# Altium PCB PCB2.PcbDoc
Units mm, origin at the board's own origin, x right, y up, seen from the top; angles counter-clockwise.
Board outline 89.99 x 120 mm, 2 copper layers (Top Layer, Bottom Layer), stack 1.57 mm thick; 16 components, 15 nets, 182 pads, 0 vias.
Unrouted connection lines stored in the file: 9.
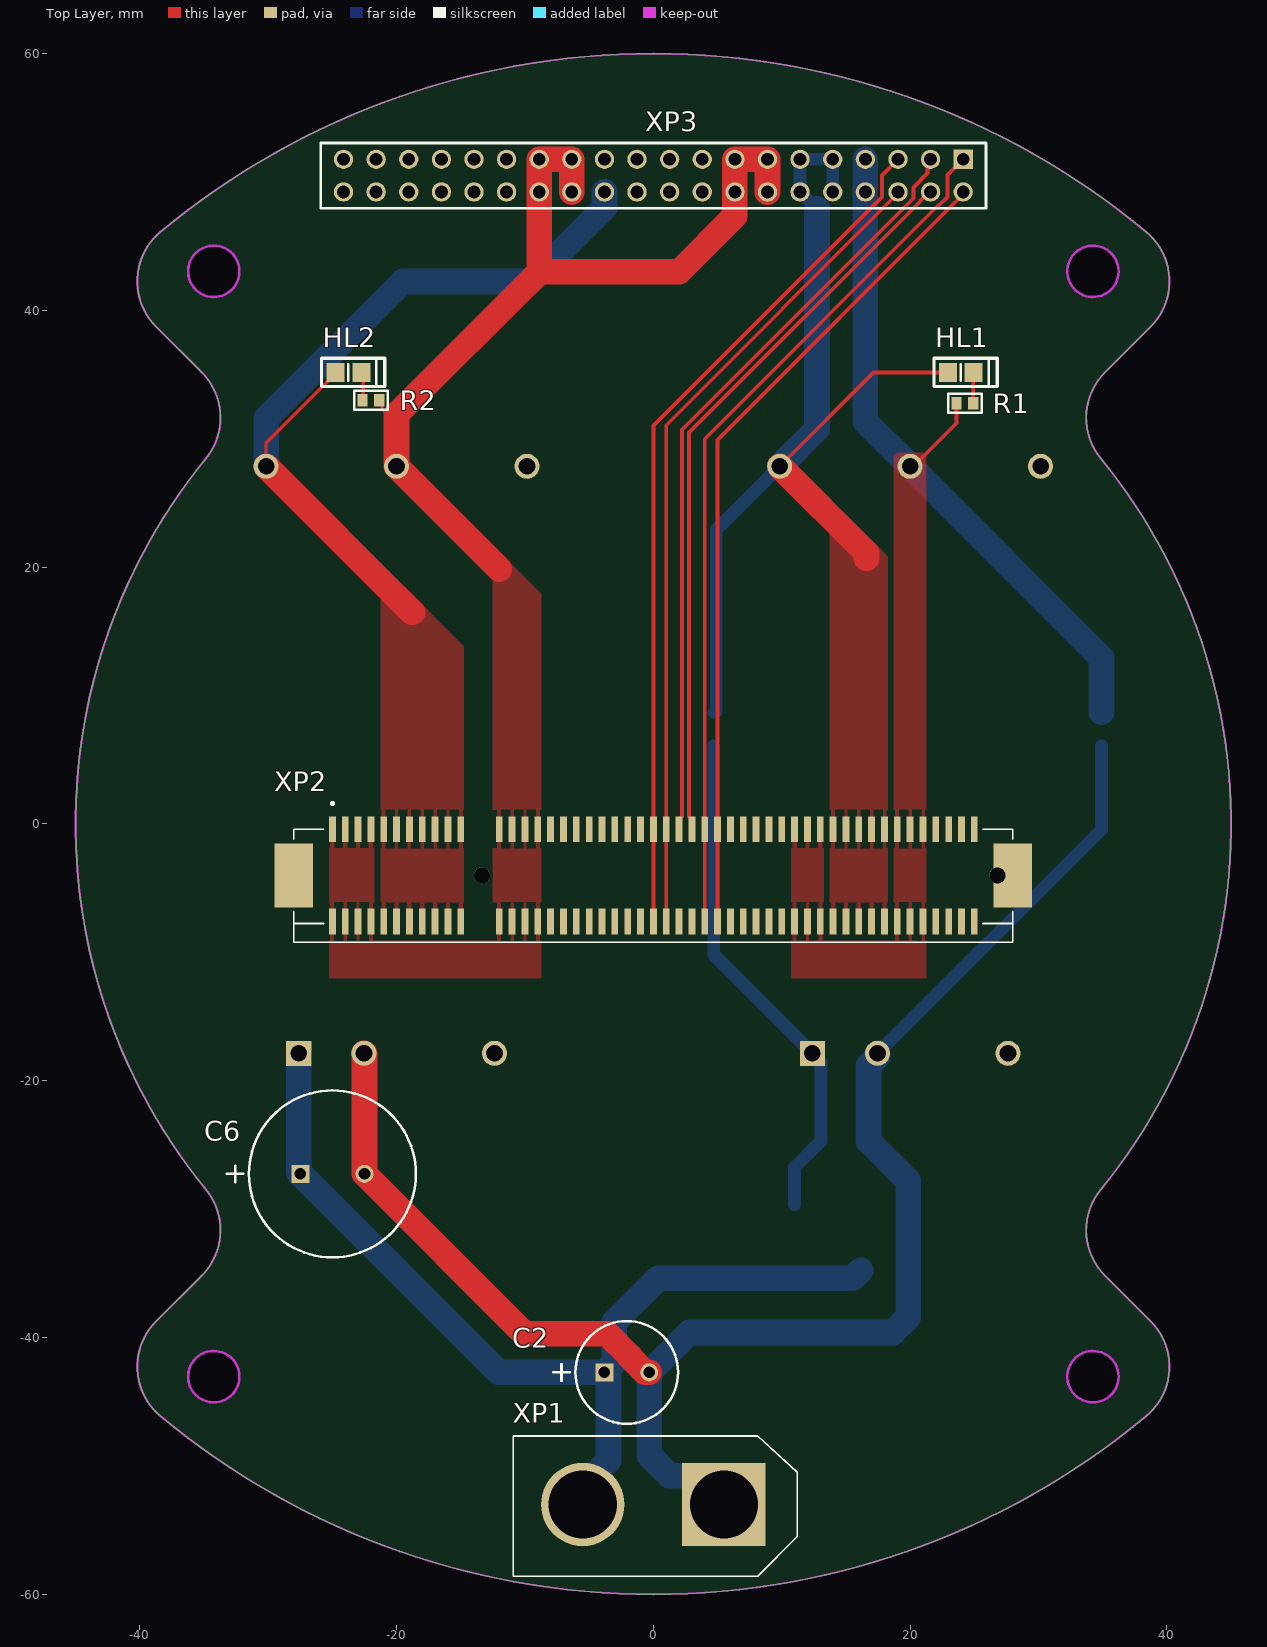
[diagram p0: Top Layer view]
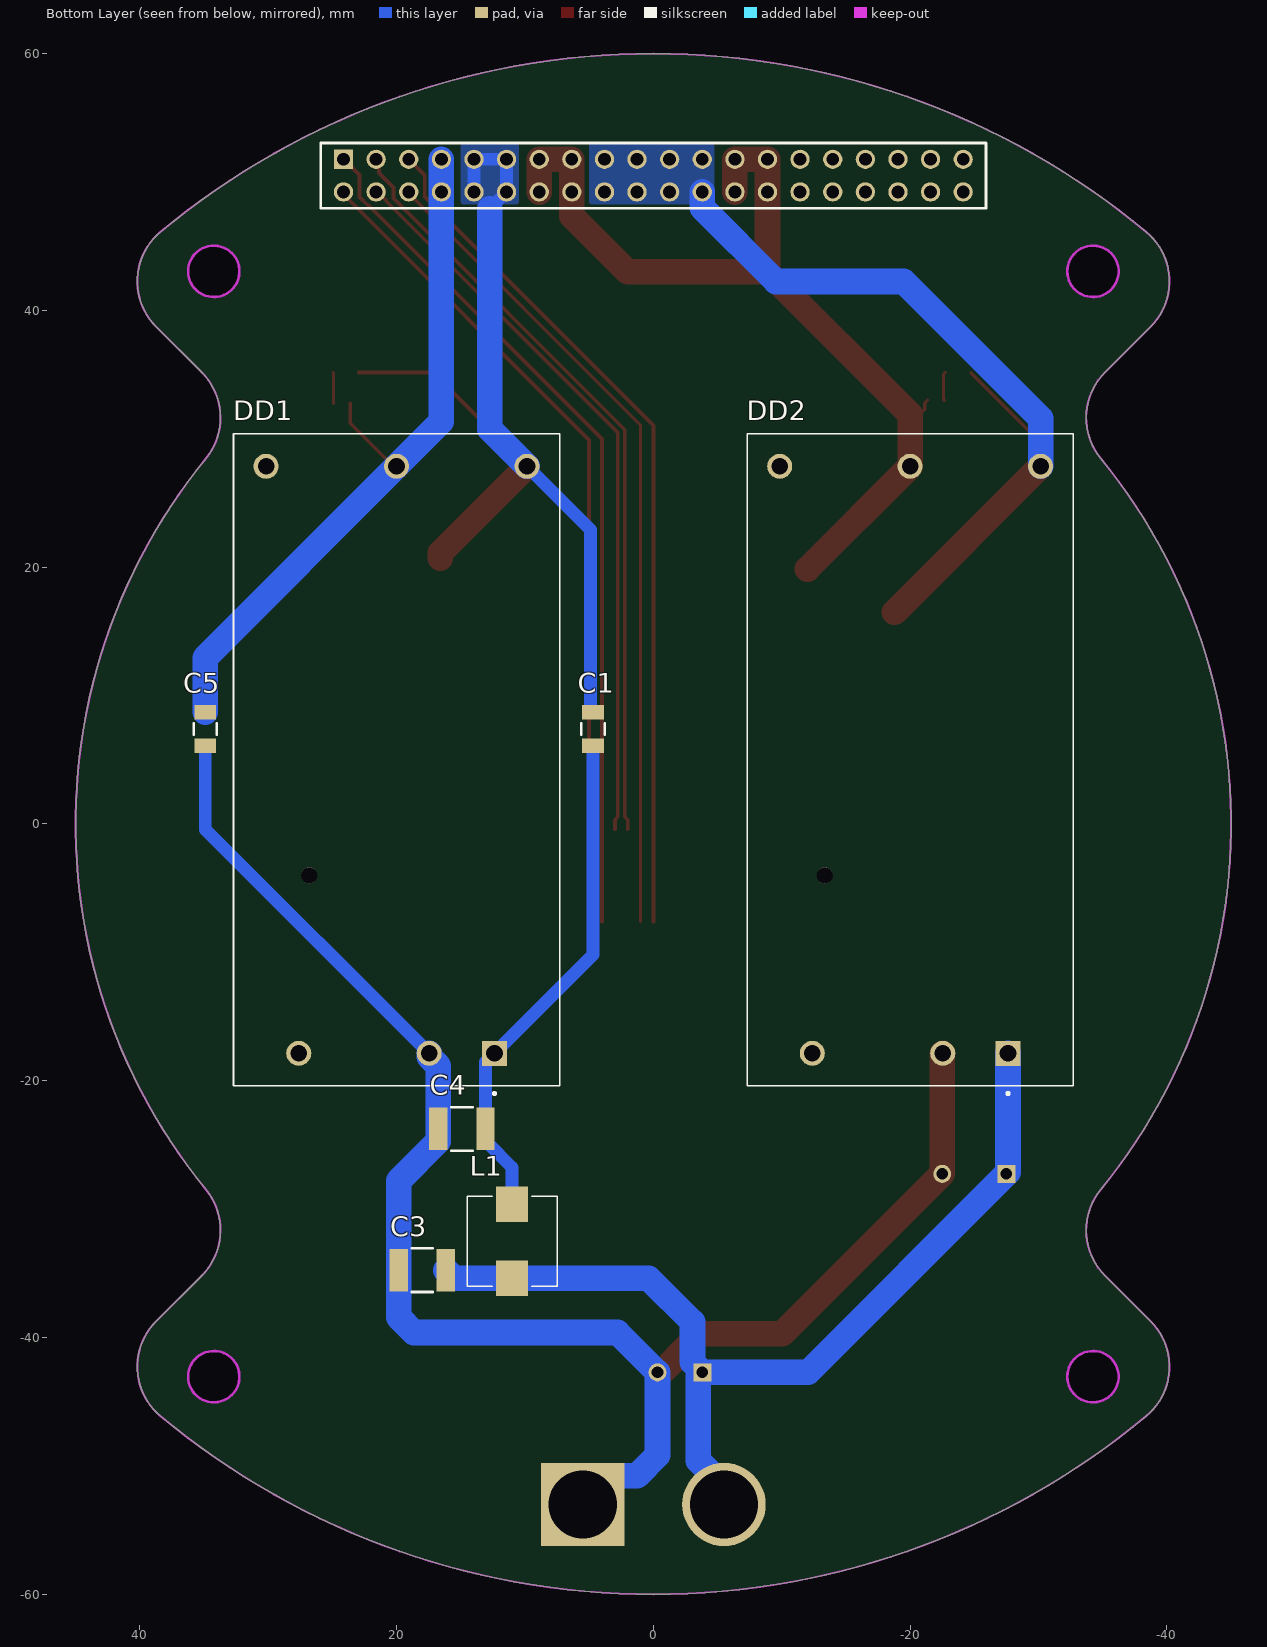
[diagram p1: Bottom Layer view, seen from below]
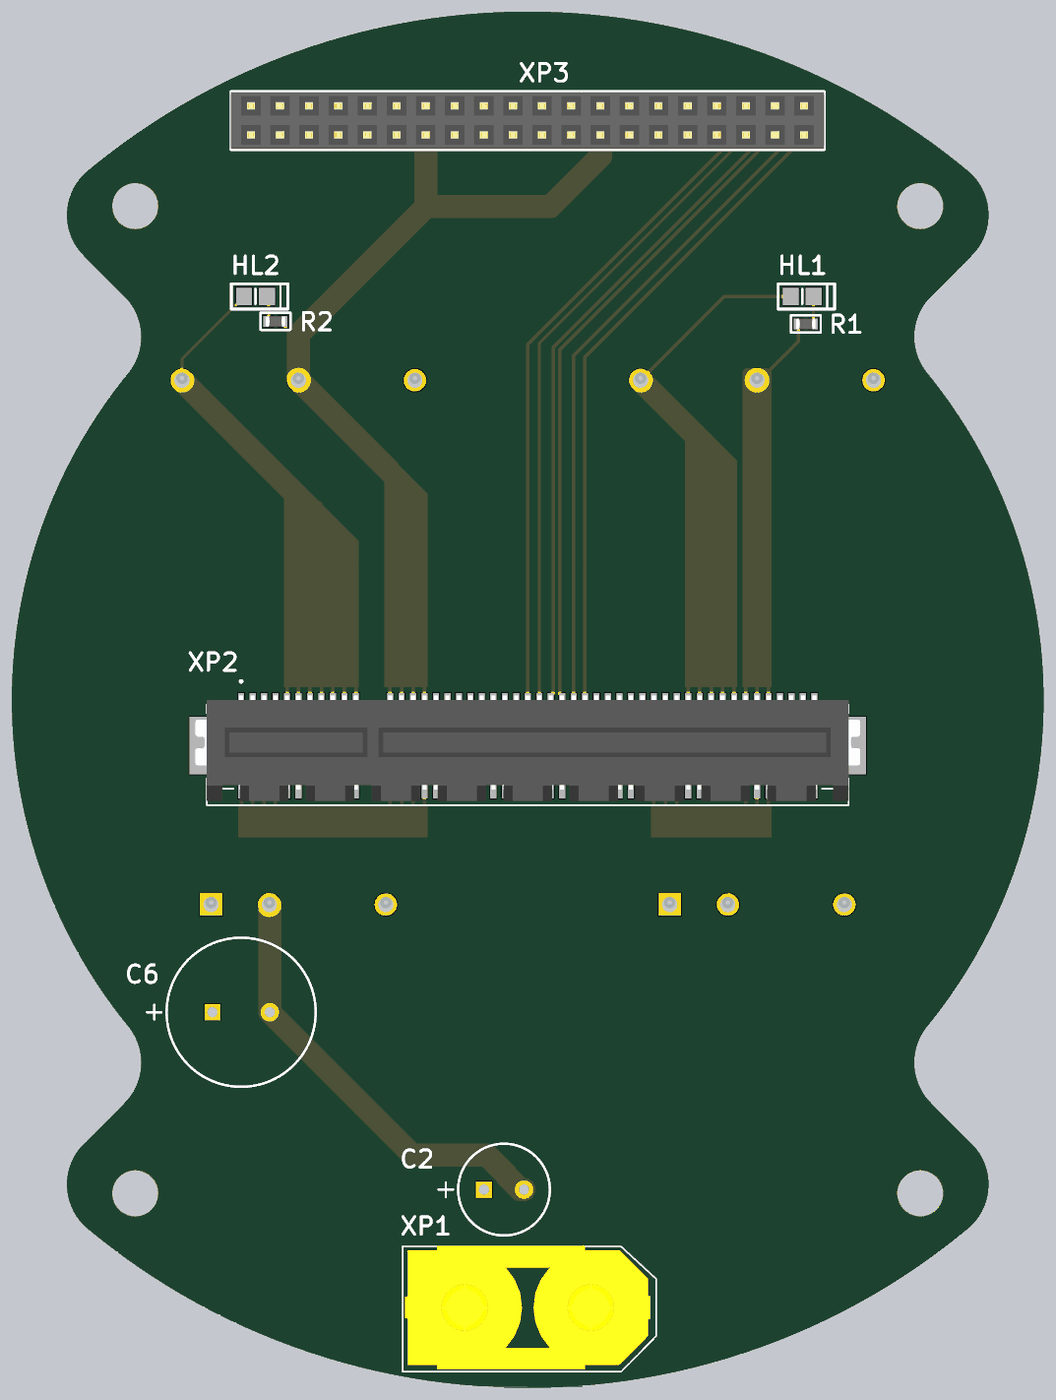
[diagram p2: 3D render of the assembled board from above, using the file's embedded part models]
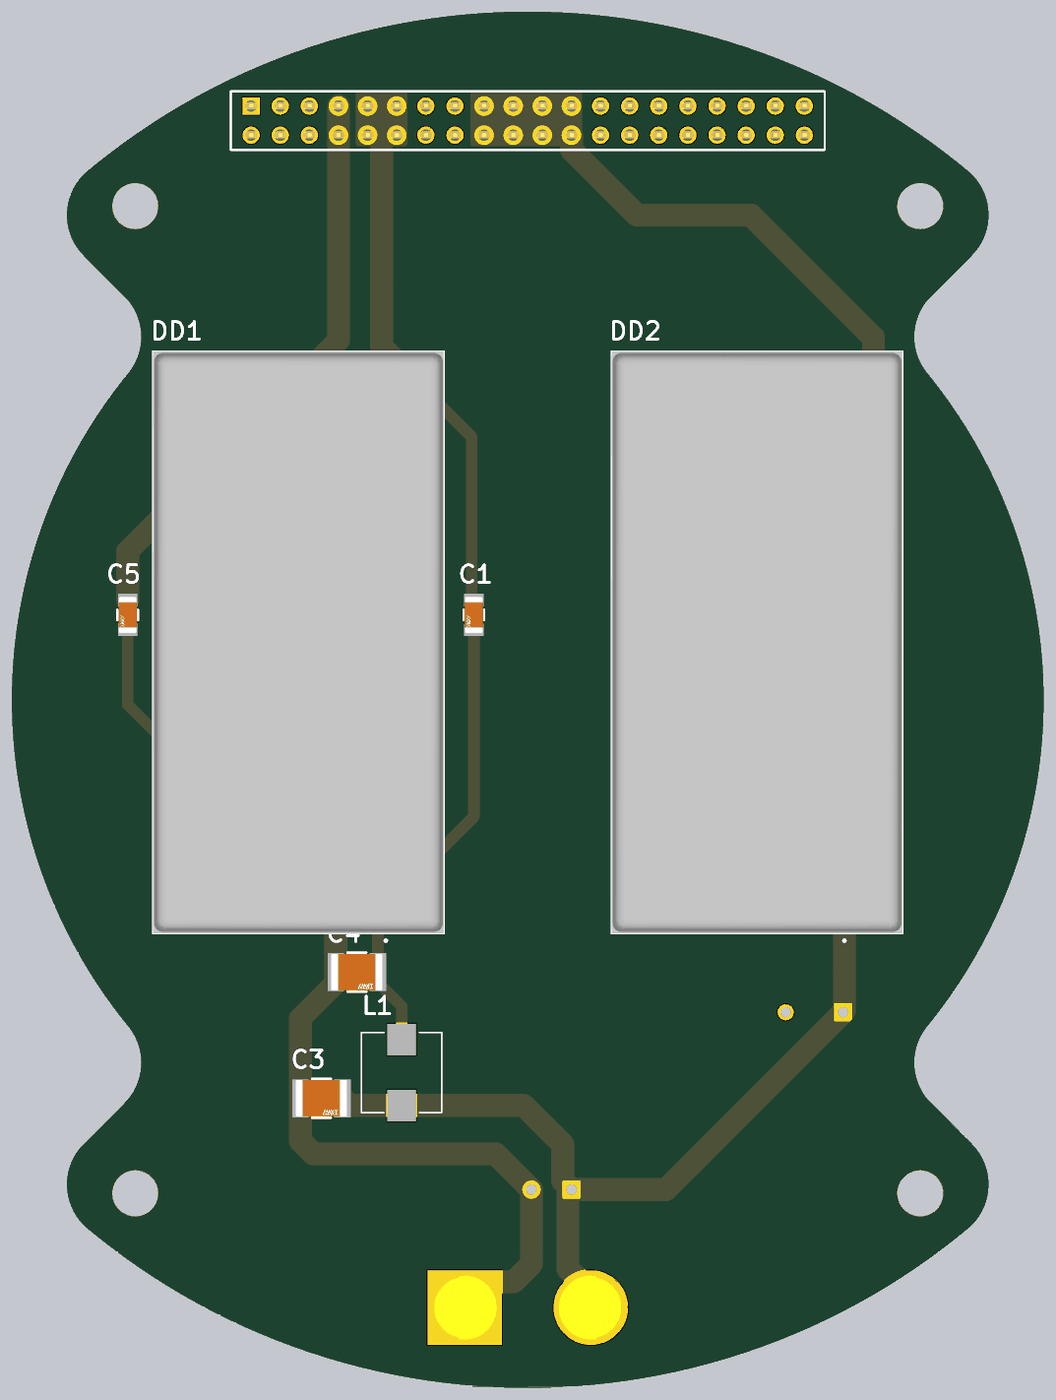
[diagram p3: 3D render of the assembled board from below, using the file's embedded part models]

## Layer stack, top to bottom
Top Solder: solder mask 0.0102, Solder Resist, Dk 3.5
Top Layer: signal copper 0.035
Dielectric 1: dielectric 1.5, FR-4, Dk 4.8
Bottom Layer: signal copper 0.035
Bottom Solder: solder mask 0.0102, Solder Resist, Dk 3.5

## Board outline
-38.394,-46.108 cw(c-35.194,-42.265) -38.73,-38.73 -35.178,-35.178 ccw(c-38.714,-31.643) -34.842,-28.478 cw(c0,0) -34.842,28.478 ccw(c-38.714,31.643) -35.178,35.178 -38.73,38.73 cw(c-35.194,42.265) -38.394,46.108 cw(c0,0) 38.394,46.108 cw(c35.194,42.265) 38.73,38.73 35.178,35.178 ccw(c38.714,31.643) 34.842,28.478 cw(c0,0) 34.842,-28.478 ccw(c38.714,-31.643) 35.178,-35.178 38.73,-38.73 cw(c35.194,-42.265) 38.394,-46.108 cw(c0,0)

## Design rules (kind name [scope] priority, off if disabled: settings)
Clearance [All] p1: gap=0.25 ignorepadtopadclearanceinfootprint=FALSE
DiffPairsRouting [All] p1: maxlimit=0.3 minlimit=0.2 mostfreqgap=0.25 toplayer_minwidth=0.2 toplayer_maxwidth=1 toplayer_prefwidth=0.25 bottomlayer_minwidth=0.2 bottomlayer_maxwidth=1 bottomlayer_prefwidth=0.25 maxuncoupledlength=12.7
Height [All] p1: minheight=0 maxheight=30 prefheight=12.7
HoleSize [All] p1: absolutevalues=TRUE maxlimit=7 minlimit=0.2 maxpercent=80.000 minpercent=20.000
MinimumSolderMaskSliver [All] p1: minsoldermaskwidth=0.2
PlaneClearance [All] p1: clearance=1
PlaneConnect [All] p1: planeconnectstyle=Direct reliefexpansion=0.508 reliefentries=4 reliefconductorwidth=0.254 reliefairgap=0.254
PolygonConnect PolygonConnectVIA [IsVia] p1: connectstyle=Direct reliefconductorwidth=0.254 reliefentries=4 polygonreliefangle="90 Angle" airgapwidth=0.254
PolygonConnect PolygonConnectPAD [All] p2: thpad.connectstyle=Direct thpad.reliefconductorwidth=0.3 thpad.reliefentries=4 thpad.polygonreliefangle="90 Angle" thpad.airgapwidth=0.5 smdpad.connectstyle=Relief smdpad.reliefconductorwidth=0.3 smdpad.reliefentries=4 smdpad.polygonreliefangle="90 Angle" smdpad.airgapwidth=0.5 via.connectstyle=Relief via.reliefconductorwidth=0.3 via.reliefentries=4 via.polygonreliefangle="90 Angle" via.airgapwidth=0.5
RoutingVias [All] p1: holewidth=0.3 width=0.7 viastyle="Through Hole" minholewidth=0.3 minwidth=0.5 maxholewidth=3 maxwidth=4
SolderMaskExpansion [All] p1: expansion=0.1 istentingtop=FALSE
Width power [InNet('No Net')] p1: maxlimit=3 minlimit=0.5 preferedwidth=0.5
Width signal [All] p2: maxlimit=3 minlimit=0.2 preferedwidth=0.25 minimp=50.000000 maximp=50.000000 favimp=50.000000
Width power_signal [InNet('No Net')] p3: maxlimit=3 minlimit=0.3 preferedwidth=0.6
24 further rules are at their usual default settings.

## Classes and differential pairs
component class dcdc: C1 C2 C3 C4 C5 C6 DD1 DD2 HL1 HL2 L1 R1 R2 XP1
component class connectors: D3 D4 D5 D6 D7 D8 L2 XP2 XP3 XP?
differential pair RS485: +RS485_P -RS485_N

## Components (designator, comment, footprint, x,y, rotation, side; value= is the part's Value field where it differs from the comment)
C1 "Capacitor" 1206 4.7,7.4 r270 bottom value="1нФ  2кВ"
C2 "100uF" CAPPR65-350-1150X800X1250 -2.074,-42.713 r0 top value=100мкФ
C3 "Capacitor" 1812 18,-34.75 r180 bottom value="6,8мкФ 50В"
C4 "Capacitor" 1812 14.909,-23.75 r180 bottom value="6,8мкФ 50В"
C5 "Capacitor" 1206 34.9,7.4 r270 bottom value="1нФ  2кВ"
C6 "1uF" THD12.5.25 -25,-27.25 r0 top value="1.2мФ 50В"
DD1 "TEN_60-2411WIN" CONV_TEN_60-2411WIN 20,5 r90 bottom value=DC/DC
DD2 "TEN_50-2412WIN" CONV_TEN_60-2411WIN -20,5 r90 bottom value=DC/DC
HL1 "=Value" 0805D 23.85,35.269 r0 top
HL2 "=Value" 0805D -23.85,35.269 r0 top
L1 "Inductance" TCK-102 11,-32.5 r90 bottom value="3,3мкГ 10А"
R1 "Resistor" 0603R 24.26,32.769 r0 top value="1,3 к"
R2 "Resistor" 0603R -22,33 r180 top value="1,3 к"
XP1 "XT-90" AMASS_XT90-M 0,-53 r180 top value=XT90-S
XP2 "PCI Express x8" pci-e-x8 0,-4 r0 top
XP3 "PC104-20*2" "PC - 104 20X2" 0,50.5 r180 top locked

## Footprints (in the part's own frame and the unit in brackets; to place one, negate y for a bottom-side part, rotate by r counter-clockwise, add the part's x,y. Pads: shape width x height; smd on the part's side, far side on the other; paste and mask are expansions set on the pad)
0603R [mm] "Chip Resistor, 2-Leads, Body 1.60x0.85mm, IPC Medium Density"
  rect 0.8x0.95 smd: 1(-0.65,0) 2(0.65,0)
  silkscreen extent -1.3,-0.75 1.3,0.75, body extent -0.87,-0.47 0.88,0.48, height 0.9
0805D [mm]
  rect 1.4x1.5 smd: 1(-0.9,-0.1) 2(1.1,-0.1)
  silkscreen extent -2,-1.2 2.93,1, body extent -0.97,-0.8 1.17,0.6, height 0.7
1206 [mm]
  rect 1.105x1.706 smd paste+0 mask+0: 1(-1.301,0) 2(1.301,0)
  silkscreen extent -0.45,-0.9 0.45,0.9, body extent -1.6,-0.8 1.6,0.8, height 1.27
1812 [mm]
  rect 1.423x3.306 smd paste+0 mask+0: 1(-1.841,0) 2(1.841,0)
  silkscreen extent -0.83,-1.7 0.83,1.7, body extent -2.25,-1.6 2.25,1.6, height 1.27
AMASS_XT90-M [mm]
  rect 6.5x6.5 hole 5.3: 1(-5.5,0)
  round 6.5 hole 5.3: 2(5.5,0)
  silkscreen extent -11.2,-5.33 10.92,5.59, body extent -10.7,-5.4 10.7,5.4, height 21.9
CAPPR65-350-1150X800X1250 [mm] "THD, 2-Leads, Dia 8mm, Body 11.5mm"
  rect 1.4x1.4 hole 0.9: 1(-1.75,0)
  round 1.4 hole 0.9: 2(1.75,0)
  silkscreen extent -5.71,-4 4,4, body extent -4,-4 4,4, height 12.5
CONV_TEN_60-2411WIN [mm]
  rect 1.95x1.95 hole 1.3: 1(-22.86,-7.62)
  round 1.95 hole 1.3: 2(-22.86,-2.54) 3(-22.86,7.62) 4(22.86,-10.16) 5(22.86,0) 6(22.86,10.16)
  silkscreen extent -26.1,-12.7 25.4,12.7, body extent -25.4,-12.7 25.4,12.7, height 10.2
"PC - 104 20X2" [mm] "Connector; Header; 20x2 Position"
  rect 1.5x1.5 hole 1: 1(-24.13,-1.27)
  round 1.5 hole 1: 2(-24.13,1.27) 3(-21.59,-1.27) 4(-21.59,1.27) 5(-19.05,-1.27) 6(-19.05,1.27) 7(-16.51,-1.27) 8(-16.51,1.27) 9(-13.97,-1.27) 10(-13.97,1.27) 11(-11.43,-1.27) 12(-11.43,1.27) 13(-8.89,-1.27) 14(-8.89,1.27) 15(-6.35,-1.27) 16(-6.35,1.27) 17(-3.81,-1.27) 18(-3.81,1.27) 19(-1.27,-1.27) 20(-1.27,1.27) 21(1.27,-1.27) 22(1.27,1.27) 23(3.81,-1.27) 24(3.81,1.27) 25(6.35,-1.27) 26(6.35,1.27) 27(8.89,-1.27) 28(8.89,1.27) 29(11.43,-1.27) 30(11.43,1.27) 31(13.97,-1.27) 32(13.97,1.27) 33(16.51,-1.27) 34(16.51,1.27) 35(19.05,-1.27) 36(19.05,1.27) 37(21.59,-1.27) 38(21.59,1.27) 39(24.13,-1.27) 40(24.13,1.27)
  silkscreen extent -25.91,-2.54 25.91,2.54, body extent -25.88,-2.47 25.92,2.43, height 12.5
pci-e-x8 [mm]
  rect 0.53x2 smd: A1(-25,3.6) A2(-24,3.6) A3(-23,3.6) A4(-22,3.6) A5(-21,3.6) A6(-20,3.6) A7(-19,3.6) A8(-18,3.6) A9(-17,3.6) A10(-16,3.6) A11(-15,3.6) A12(-12,3.6) A13(-11,3.6) A14(-10,3.6) A15(-9,3.6) A16(-8,3.6) A17(-7,3.6) A18(-6,3.6) A19(-5,3.6) A20(-4,3.6) A21(-3,3.6) A22(-2,3.6) A23(-1,3.6) A24(0,3.6) A25(1,3.6) A26(2,3.6) A27(3,3.6) A28(4,3.6) A29(5,3.6) A30(6,3.6) A31(7,3.6) A32(8,3.6) A33(9,3.6) A34(10,3.6) A35(11,3.6) A36(12,3.6) A37(13,3.6) A38(14,3.6) A39(15,3.6) A40(16,3.6) A41(17,3.6) A42(18,3.6) A43(19,3.6) A44(20,3.6) A45(21,3.6) A46(22,3.6) A47(23,3.6) A48(24,3.6) A49(25,3.6) B1(-25,-3.6) B2(-24,-3.6) B3(-23,-3.6) B4(-22,-3.6) B5(-21,-3.6) B6(-20,-3.6) B7(-19,-3.6) B8(-18,-3.6) B9(-17,-3.6) B10(-16,-3.6) B11(-15,-3.6) B12(-12,-3.6) B13(-11,-3.6) B14(-10,-3.6) B15(-9,-3.6) B16(-8,-3.6) B17(-7,-3.6) B18(-6,-3.6) B19(-5,-3.6) B20(-4,-3.6) B21(-3,-3.6) B22(-2,-3.6) B23(-1,-3.6) B24(0,-3.6) B25(1,-3.6) B26(2,-3.6) B27(3,-3.6) B28(4,-3.6) B29(5,-3.6) B30(6,-3.6) B31(7,-3.6) B32(8,-3.6) B33(9,-3.6) B34(10,-3.6) B35(11,-3.6) B36(12,-3.6) B37(13,-3.6) B38(14,-3.6) B39(15,-3.6) B40(16,-3.6) B41(17,-3.6) B42(18,-3.6) B43(19,-3.6) B44(20,-3.6) B45(21,-3.6) B46(22,-3.6) B47(23,-3.6) B48(24,-3.6) B49(25,-3.6)
  rect 3x5 smd: SH1(-28,0) SH2(28,0)
  round 1.25 hole 1.25 unplated: ""(-13.35,0) ""(26.8,0)
  silkscreen extent -28,-5.2 28,5.7, body extent -29,-4.83 29,4.37, height 11.25
TCK-102 [mm]
  rect 2.75x2.5 smd: 1(-2.875,0) 2(2.875,0)
  silkscreen extent -3.5,-3.5 3.5,3.5, body extent -3.25,-3.25 3.25,3.25, height 4.2
THD12.5.25 [mm] "THD, 2-Leads, Dia 12.5mm, Body 25mm"
  rect 1.4x1.4 hole 0.9: 1(-2.5,0)
  round 1.4 hole 0.9: 2(2.5,0)
  silkscreen extent -8.22,-6.5 6.5,6.5, body extent -6.23,-6.28 6.27,6.22, height 26

## Part data
C2: library part Capacitor_pol_100uF, Shop=https://www.chipdip.ru/product0/9000565887
C6: library part Capacitor_pol, Shop="https://www.chipdip.ru/product0/8003159251 https://www.promelec.ru/product/379547/"
DD1: Package=None, Availability=Unavailable, MP=TEN_60-2411WIN, Price=None
DD2: library part TEN_60-2411WIN, Package=None, Availability=Unavailable, MP=TEN_60-2411WIN, Price=None
HL1 HL2: library part LED, Case=-, Color={Цвет}, Datasheet=-, Manufacturer=-, Notice=-, Rate=-, Shop=-
XP1: Case=корпус, Manufacturer=Connfly, Value1=GND, Value2=+VBAT, Datasheet=https://lib.chipdip.ru/413/DOC001413777.pdf, Notice="Вилка-мама 2 пина, шаг 2.5мм", Rate="500В AC 1min", Shop=https://www.chipdip.ru/product/cwf-2
XP2: library part "PCI E x8", "PCI ExpressÂ®x8 vertical Card Edge Connector, 98 Positions, 1mm (0.039inch) Pitch", Package=None, Availability="In Stock", Check_prices=https://www.snapeda.com/parts/10146070-112Y0LF/Amphenol+FCI/view-part/?ref=eda, MF="Amphenol ICC (FCI)", MP=10146070-112Y0LF, Price=None, Purchase-URL=https://pricing.snapeda.com/search/part/10146070-112Y0LF/?ref=eda, SnapEDA_Link=https://www.snapeda.com/parts/10146070-112Y0LF/Amphenol+FCI/view-part/?ref=snap
XP3: Value1=CAN_H, Value2=CAN_L, Value3=RS485_A, Value4=RS485_B, Value5="I2C SCL", Value6="I2C SDA", Value7={Value7}, Value8={Value8}, Value9={Value9}, Value10={Value10}, Value11={Value11}, Value12={Value12}, Value13=Общ., Value17=+12В, Value29={Value29}, Value30={Value30}, Value31={Value31}, Value32={Value32}, Value33={Value33}, Value34={Value34}, Value35={Value35}, Value36={Value36}, Value37={Value37}, Value38={Value38}, Value39={Value39}, Value40={Value40}, Notice=PC104-40, Value14=Общ., Value15=Общ., Value16=Общ., Value18=+12В, Value19=+12В, Value20=+12В, Value21=+12В, Value22=+12В, Value23=+12В, Value24=+12В, Value25=Общ., Value26=Общ., Value27=Общ., Value28=Общ.
L1: Shop=https://www.chipdip.ru/product1/8009327451

## Free pads (board coordinates)
  round 2 hole 4: п1(-34.238,-43.043) п1(-34.238,43.043) п1(34.238,-43.043) п1(34.238,43.043)

## Nets (pads, with @x,y where several pads share a name; then routed paths per layer and width w, separated by ;. In a path a pad name is that pad's centre, name@x,y a point inside that pad or via, vN(x,y) a via of type N, cw(c..) or ccw(c..) an arc to the next point about the centre after c; other vN are vias at no path point)
+5В: C1.1 DD1.4 HL1.1 XP2.A38 XP2.A39 XP2.A40 XP2.A41 XP2.A42 XP2.B38 XP2.B39 XP2.B40 XP2.B41 XP2.B42 XP3.9 XP3.10 XP3.11 XP3.12 | length 78.2
  Top Layer w0.3: DD1.4 17.149,35.169 HL1.1
  Top Layer w2: DD1.4 16.6,21.1 16.6,20.7
  Bottom Layer w1: C1.1 4.848,8.701 4.9,8.753 4.9,22.92 DD1.4 ; 12.75,47.91 XP3.12 XP3.11 XP3.9 XP3.10
  Bottom Layer w2: DD1.4 12.75,30.77 12.75,47.91
+12В: DD2.4 HL2.1 XP2.A5 XP2.A6 XP2.A7 XP2.A8 XP2.A9 XP2.A10 XP2.A11 XP2.B5 XP2.B6 XP2.B7 XP2.B8 XP2.B9 XP2.B10 XP2.B11 XP3.17 XP3.18 XP3.19 XP3.20 XP3.21 XP3.22 XP3.23 XP3.24 | length 63.8
  Top Layer w0.25: DD2.4 -30.16,29.709 -24.75,35.119 HL2.1
  Top Layer w2: DD2.4 -18.8,16.5 -18.75,16.5
  Bottom Layer w2: DD2.4 -30.16,31.59 -19.5,42.25 -9.55,42.25 -3.81,47.99 XP3.24
CAN_H: XP2.A28 XP2.B28 XP3.1 | length 67.7
  Top Layer w0.3: XP2.B28 XP2.A28 4,30 22.192,48.192 22.249,48.192 22.9,48.843 22.9,50.54 XP3.1
CAN_L: XP2.A29 XP2.B29 XP3.2 | length 64.8
  Top Layer w0.3: XP2.B29 XP2.A29 5,29.916 24.13,49.046 XP3.2
GND_5: C5.1 DD1.5 R1.1 XP2.A35 XP2.A36 XP2.A37 XP2.A43 XP2.A44 XP2.A45 XP2.B35 XP2.B36 XP2.B37 XP2.B43 XP2.B44 XP2.B45 XP3.7 XP3.8 | length 57.2
  Top Layer w0.3: DD1.5 20.26,27.86 23.61,31.21 R1.1
  Bottom Layer w2: XP3.7 XP3.8 16.51,31.35 DD1.5 34.9,12.96 C5.1
GND_12: DD2.5 R2.1 XP2.A1 XP2.A2 XP2.A3 XP2.A4 XP2.A12 XP2.A13 XP2.A14 XP2.A15 XP2.B1 XP2.B2 XP2.B3 XP2.B4 XP2.B12 XP2.B13 XP2.B14 XP2.B15 XP3.13 XP3.14 XP3.15 XP3.16 XP3.25 XP3.26 XP3.27 XP3.28 | length 76.9
  Top Layer w0.25: R2.1 -21.135,32.785 -21.135,32.31 -20.7,31.875 -20.7,28.856 DD2.5@-20,28.156
  Top Layer w2: -12,19.86 DD2.5 -20,28.156 -20,31.89 -8.89,43 ; XP3.26 XP3.25 XP3.27 XP3.28 -8.89,43 ; XP3.14 XP3.13 XP3.15 XP3.16 6.35,47.35 2,43 -8.89,43
GND_BAT: C2.2 C3.1 C4.1 C5.2 C6.2 DD1.2 DD2.2 XP1.1 | length 126.9
  Top Layer w2: DD2.2 -22.5,-17.9 C6.2 -10.05,-39.7 -3.598,-39.7 -1.824,-41.474 -1.824,-41.541 -0.652,-42.713 C2.2
  Bottom Layer w1: DD1.2 34.9,-0.42 C5.2
  Bottom Layer w2: XP1.1@5.2,-53 2.95,-50.75 1.25,-50.75 -0.324,-49.176 C2.2 2.789,-39.6 18.669,-39.6 19.841,-38.428 19.841,-27.782 16.75,-24.692 C4.1 16.75,-18.827 17.46,-18.117 DD1.2
I2C_SCL: XP2.A24 XP2.B24 XP3.5 | length 67.3
  Top Layer w0.3: XP2.B24 XP2.A24 0,31.023 17.8,48.823 17.8,50.52 XP3.5
I2C_SDA: XP2.A25 XP2.B25 XP3.6 | length 64.3
  Top Layer w0.25: XP2.B25 XP2.A25 1,31.067 19.05,49.117 XP3.6
NetC1_2: C1.2 C4.2 DD1.1 L1.2 | length 40.1
  Bottom Layer w1: C1.2 4.7,-10.18 DD1.1 13.069,-18.549 C4.2 13.069,-24.692 12.857,-24.903 12.847,-24.903 11,-26.75 L1.2
NetHL1_2: HL1.2 R1.2 | length 2.4
  Top Layer w0.25: R1.2 24.91,35.129 HL1.2
NetHL2_2: HL2.2 R2.2 | length 2.3
  Top Layer w0.25: HL2.2 -22.6,35.019 -22.6,33.05 R2.2
RS485_N: XP2.A27 XP2.B27 XP3.4 | length 57.6
  Top Layer w0.3: XP2.A27 3,0.335 2.775,0.56 2.775,30.48 20.8,48.505 20.8,48.571 21.459,49.23 XP3.4
RS485_P: XP2.A26 XP2.B26 XP3.3 | length 60.3
  Top Layer w0.3: XP2.A26 2,0.335 2.225,0.56 2.225,30.708 20.25,48.733 20.25,49.587 21.36,50.697 21.36,51.54 XP3.3
VBAT: C2.1 C3.2 C6.1 DD2.1 L1.1 XP1.2 | length 76
  Bottom Layer w2: DD2.1 -27.62,-27.13 C6.1 -12.037,-42.713 C2.1 ; XP1.2@-5.8,-53 -5.8,-51.878 -3.5,-49.578 -3.5,-43.036 C2.1 ; C3.2 15.534,-35.375 L1.1 0.375,-35.375 -3.044,-38.794 -3.044,-41.933 C2.1
pads on no net: DD1.3 DD1.6 DD2.3 DD2.6 XP2. XP2.A16 XP2.A17 XP2.A18 XP2.A19 XP2.A20 XP2.A21 XP2.A22 XP2.A23 XP2.A30 XP2.A31 XP2.A32 XP2.A33 XP2.A34 XP2.A46 XP2.A47 XP2.A48 XP2.A49 XP2.B16 XP2.B17 XP2.B18 XP2.B19 XP2.B20 XP2.B21 XP2.B22 XP2.B23 XP2.B30 XP2.B31 XP2.B32 XP2.B33 XP2.B34 XP2.B46 XP2.B47 XP2.B48 XP2.B49 XP2.SH1 XP2.SH2 XP3.29 XP3.30 XP3.31 XP3.32 XP3.33 XP3.34 XP3.35 XP3.36 XP3.37 XP3.38 XP3.39 XP3.40

## Polygon pours and split planes (outlines as drawn)
+12В on Bottom Layer "+12В_L02_P001" (solid, pour order 1): 5,48.5 5,52.75 ccw(c4.75,52.75) 4.75,53 -4.49,53 ccw(c-4.49,52.75) -4.74,52.75 -4.74,48.5 ccw(c-4.49,48.5) -4.49,48.25 4.75,48.25 ccw(c4.75,48.5)
+5В on Bottom Layer "+5В_L02_P000" (solid, pour order 0): 15,48.5 15,52.75 ccw(c14.75,52.75) 14.75,53 10.75,53 ccw(c10.75,52.75) 10.5,52.75 10.5,48.5 ccw(c10.75,48.5) 10.75,48.25 14.75,48.25 ccw(c14.75,48.5)
GND_5 on Top Layer "GND_5_L01_P010" (solid, pour order 10): 10.75,-9.1 20.55,-9.1 20.55,-12 10.75,-12
GND_5 on Top Layer "GND_5_L01_P003" (solid, pour order 3): 18.735,28.635 18.735,-12 21.265,-12 21.265,28.635 21,28.9 19,28.9
GND_5 on Top Layer "GND_5_L01_P004" (solid, pour order 4): 10.75,0.6 10.75,-12 13.28,-12 13.28,0.6
GND_12 on Top Layer "GND_12_L01_P009" (solid, pour order 9): -22.1,-9.1 -12.3,-9.1 -12.3,-12 -22.1,-12
GND_12 on Top Layer "GND_12_L01_P008" (solid, pour order 8): -12.5,20.4 -12.5,-12 -8.75,-12 -8.75,17.95 -11.2,20.4
+12В on Top Layer "+12В_L01_P007" (solid, pour order 7): -21.25,18.5 -21.25,-8.6 -14.75,-8.6 -14.75,13.85 -19.4,18.5
GND_12 on Top Layer "GND_12_L01_P006" (solid, pour order 6): -25.25,0.6 -25.25,-12 -21.75,-12 -21.75,0.6
+5В on Top Layer "+5В_L01_P005" (solid, pour order 5): 13.735,24.4 13.735,-8.6 18.25,-8.6 18.25,20.85 14.7,24.4

## Keep-outs
Keep-Out Layer:
  circle w0.2: c-34.238,43.043 r2
  circle w0.2: c34.238,-43.043 r2
  circle w0.2: c-34.238,-43.043 r2
  circle w0.2: c34.238,43.043 r2
  lines w0.15: -38.73,-38.73 ccw(c-35.194,-42.265) -38.394,-46.108 ccw(c0,0) 38.394,-46.108 ccw(c35.194,-42.265) 38.73,-38.73 35.178,-35.178 cw(c38.714,-31.643) 34.842,-28.478 ccw(c0,0) 34.842,28.478 cw(c38.714,31.643) 35.178,35.178 38.73,38.73 ccw(c35.194,42.265) 38.394,46.108 ccw(c0,0) -38.394,46.108 ccw(c-35.194,42.265) -38.73,38.73 -35.178,35.178 cw(c-38.714,31.643) -34.842,28.478 ccw(c0,0) -34.842,-28.478 cw(c-38.714,-31.643) -35.178,-35.178 -38.73,-38.73

## Silkscreen, mask and mechanical layers (free items; w line width, h text height)
Drill Drawing:
  lines w0.013: 0,-63.3 0.1,-63.4